# Altium PCB 128x64液晶接线模块.PCBDOC
Units mm, origin at the board's own origin, x right, y up, seen from the top; angles counter-clockwise.
Board outline 152.4 x 101.6 mm, 2 copper layers (Top Layer, Bottom Layer); 4 components, 18 nets, 53 pads, 0 vias.
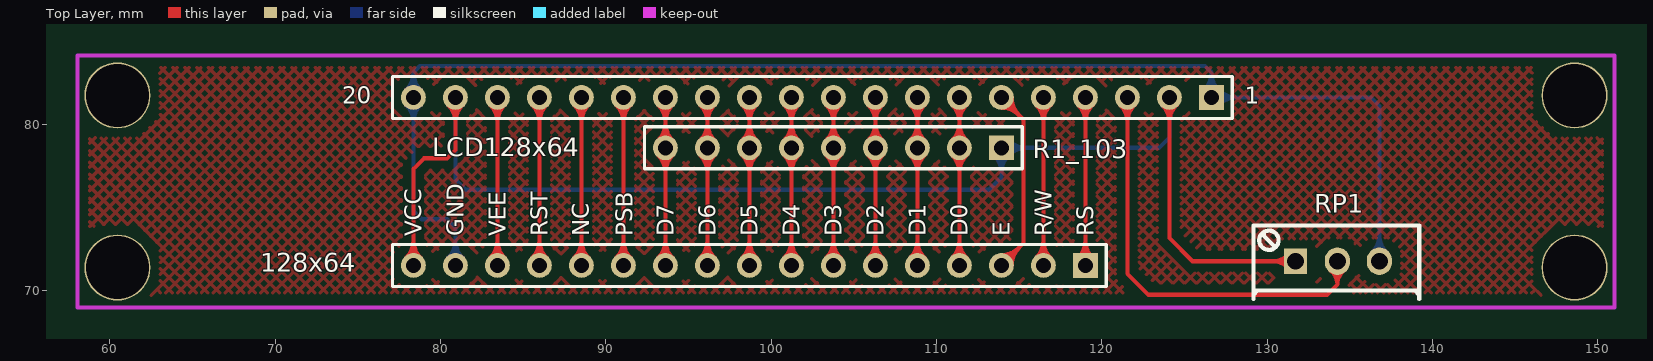
[diagram p0: Top Layer view]
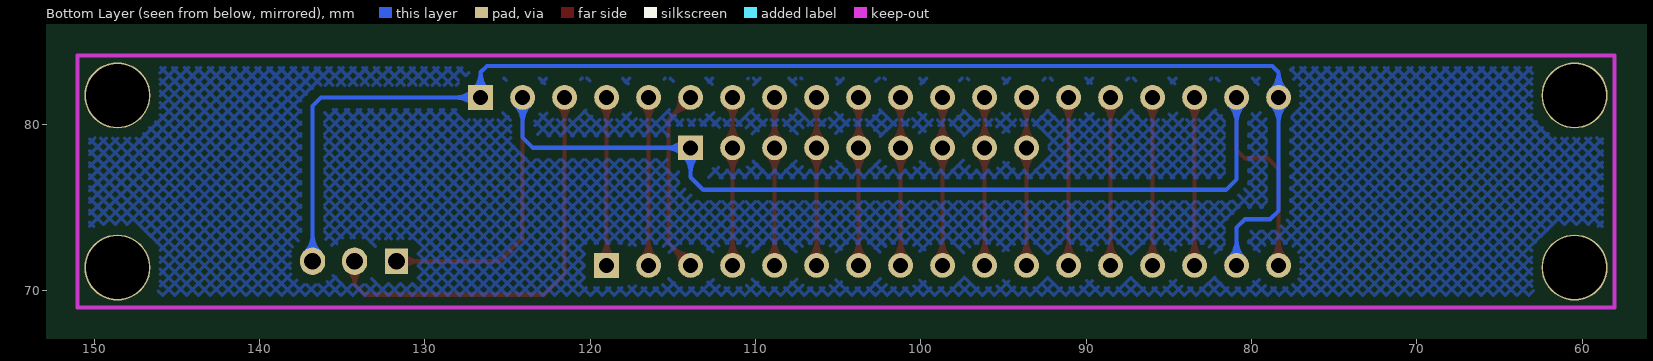
[diagram p1: Bottom Layer view, seen from below]

## Layer stack, top to bottom
Top Layer: signal copper 0.0356
Dielectric: dielectric 0.32, FR-4, Dk 4.8
Bottom Layer: signal copper 0.0356

## Board outline
25.4,25.4 177.8,25.4 177.8,127 25.4,127

## Design rules (kind name [scope] priority, off if disabled: settings)
Clearance [All] p1: gap=0.5
ComponentClearance [All] p1: gap=0.254 collisioncheckmode=3 verticalgap=0.254
PolygonConnect [All] p1: connectstyle=Relief reliefconductorwidth=0.254 reliefentries=4 polygonreliefangle="90 Angle"
RoutingVias [All] p1: holewidth=0.711 width=1.27 viastyle="Through Hole" minholewidth=0.711 minwidth=1.27 maxholewidth=0.711 maxwidth=1.27
SolderMaskExpansion [All] p1: expansion=0.102
TestPointUsage [All] p1: valid=0 allowmultiple=FALSE
Testpoint [All] p1: side=15 testpointundercomponent=TRUE minsize=1.016 maxsize=2.54 preferedsize=1.524 minholesize=0 maxholesize=1.016 preferedholesize=0.813 testpointgrid=0.025 style=1023 order=0-112345678
Width [All] p1: maxlimit=0.254 minlimit=0.254 preferedwidth=0.254
17 further rules are at their usual default settings.

## Components (designator, comment, footprint, x,y, rotation, side; value= is the part's Value field where it differs from the comment)
128x64 "Header 17" HDR1X17 118.999,71.501 r180 top
LCD128x64 "Header 20" HDR1X20 126.619,81.661 r180 top
R1_103 "Header 9" HDR1X9 113.919,78.613 r180 top
RP1 "Res _JT" SIP3-D 131.699,71.501 r0 top

## Footprints (in the part's own frame and the unit in brackets; to place one, negate y for a bottom-side part, rotate by r counter-clockwise, add the part's x,y. Pads: shape width x height; smd on the part's side, far side on the other; paste and mask are expansions set on the pad)
HDR1X9 [mm] "Connector; Header; 9 Position"
  rect 1.5x1.5 hole 0.9: 1(0,0)
  round 1.5 hole 0.9: 2(2.54,0) 3(5.08,0) 4(7.62,0) 5(10.16,0) 6(12.7,0) 7(15.24,0) 8(17.78,0) 9(20.32,0)
  silkscreen extent -1.27,-1.27 21.59,1.27
HDR1X17 [mm] "Connector; Header; 17 Position"
  rect 1.5x1.5 hole 0.9: 1(0,0)
  round 1.5 hole 0.9: 2(2.54,0) 3(5.08,0) 4(7.62,0) 5(10.16,0) 6(12.7,0) 7(15.24,0) 8(17.78,0) 9(20.32,0) 10(22.86,0) 11(25.4,0) 12(27.94,0) 13(30.48,0) 14(33.02,0) 15(35.56,0) 16(38.1,0) 17(40.64,0)
  silkscreen extent -1.27,-1.27 41.91,1.27
HDR1X20 [mm] "Connector; Header; 20 Position"
  rect 1.5x1.5 hole 0.9: 1(0,0)
  round 1.5 hole 0.9: 2(2.54,0) 3(5.08,0) 4(7.62,0) 5(10.16,0) 6(12.7,0) 7(15.24,0) 8(17.78,0) 9(20.32,0) 10(22.86,0) 11(25.4,0) 12(27.94,0) 13(30.48,0) 14(33.02,0) 15(35.56,0) 16(38.1,0) 17(40.64,0) 18(43.18,0) 19(45.72,0) 20(48.26,0)
  silkscreen extent -1.27,-1.27 49.53,1.27
SIP3-D [mil] "精调电位器"
  rect 55x60 hole 40: 1(0,10)
  oval 60x65 hole 40: 2(200,10) 3(100,10)
  silkscreen extent -100,-80 295,95

## Part data
128x64: library part "Header 13", "Header, 13-Pin"
LCD128x64: "Header, 20-Pin"
R1_103: "Header, 9-Pin"
RP1: "j精调电阻"

## Free pads (board coordinates)
  round 4 hole 3.8: 1(60.452,81.788) 2(60.452,71.374) 3(148.59,81.788) 4(148.59,71.374)

## Nets (pads, with @x,y where several pads share a name; then routed paths per layer and width w, separated by ;. In a path a pad name is that pad's centre, name@x,y a point inside that pad or via, vN(x,y) a via of type N, cw(c..) or ccw(c..) an arc to the next point about the centre after c; other vN are vias at no path point)
BLA: 128x64.17 LCD128x64.2 LCD128x64.19 R1_103.1 RP1.1 | length 111.6
  Top Layer w0.254: 128x64.17@77.918,71.942 ccw(c76.855,73.005) 78.359,73.005 ccw(c79.863,73.005) 128x64.17@78.8,71.942 ; 128x64.17@78.098,71.762 ccw(c77.468,72.392) 78.359,72.392 ccw(c79.25,72.392) 128x64.17@78.62,71.762 ; 128x64.17 78.359,77.343 78.994,77.978 80.391,77.978 80.899,78.486 LCD128x64.19 ; LCD128x64.19@80.458,81.22 cw(c79.395,80.157) 80.899,80.157 cw(c82.403,80.157) LCD128x64.19@81.34,81.22 ; LCD128x64.19@80.638,81.4 cw(c80.008,80.77) 80.899,80.77 cw(c81.79,80.77) LCD128x64.19@81.16,81.4 ; LCD128x64.2@123.638,81.22 cw(c122.575,80.157) 124.079,80.157 cw(c125.583,80.157) LCD128x64.2@124.52,81.22 ; LCD128x64.2@123.818,81.4 cw(c123.188,80.77) 124.079,80.77 cw(c124.97,80.77) LCD128x64.2@124.34,81.4 ; LCD128x64.2 124.079,73.152 125.476,71.755 RP1.1 ; RP1.1@131.295,71.351 ccw(c130.319,70.375) 130.319,71.755 ccw(c130.319,73.135) RP1.1@131.295,72.159 ; RP1.1@131.474,71.53 ccw(c130.932,70.988) 130.932,71.755 ccw(c130.932,72.522) RP1.1@131.474,71.98
  Bottom Layer w0.254: LCD128x64.19@80.458,81.22 cw(c79.395,80.157) 80.899,80.157 cw(c82.403,80.157) LCD128x64.19@81.34,81.22 ; LCD128x64.19@80.638,81.4 cw(c80.008,80.77) 80.899,80.77 cw(c81.79,80.77) LCD128x64.19@81.16,81.4 ; LCD128x64.19 80.899,76.708 81.534,76.073 113.157,76.073 113.919,76.835 R1_103.1 123.444,78.613 124.079,79.248 LCD128x64.2 ; R1_103.1@113.478,78.172 cw(c112.415,77.109) 113.919,77.109 cw(c115.423,77.109) 114.36,78.172 cw(c115.423,77.109) 115.423,78.613 cw(c115.423,80.117) R1_103.1@114.36,79.054 ; R1_103.1@113.658,78.352 cw(c113.028,77.722) 113.919,77.722 cw(c114.81,77.722) 114.18,78.352 cw(c114.81,77.722) 114.81,78.613 cw(c114.81,79.504) R1_103.1@114.18,78.874 ; LCD128x64.2@123.638,81.22 cw(c122.575,80.157) 124.079,80.157 cw(c125.583,80.157) LCD128x64.2@124.52,81.22 ; LCD128x64.2@123.818,81.4 cw(c123.188,80.77) 124.079,80.77 cw(c124.97,80.77) LCD128x64.2@124.34,81.4
BLK: 128x64.16 LCD128x64.1 LCD128x64.20 RP1.2 | length 106.2
  Bottom Layer w0.254: LCD128x64.20@77.918,81.22 cw(c76.855,80.157) 78.359,80.157 cw(c79.863,80.157) LCD128x64.20@78.8,81.22 ; LCD128x64.20@77.918,82.102 ccw(c76.855,83.165) 78.359,83.165 ccw(c79.863,83.165) LCD128x64.20@78.8,82.102 ; LCD128x64.20@78.098,81.4 cw(c77.468,80.77) 78.359,80.77 cw(c79.25,80.77) LCD128x64.20@78.62,81.4 ; LCD128x64.20@78.098,81.922 ccw(c77.468,82.552) 78.359,82.552 ccw(c79.25,82.552) LCD128x64.20@78.62,81.922 ; 128x64.16@80.458,71.942 ccw(c79.395,73.005) 80.899,73.005 ccw(c82.403,73.005) 128x64.16@81.34,71.942 ; 128x64.16@80.638,71.762 ccw(c80.008,72.392) 80.899,72.392 ccw(c81.79,72.392) 128x64.16@81.16,71.762 ; 128x64.16 80.899,73.787 80.391,74.295 78.867,74.295 78.359,74.803 78.359,83.185 78.74,83.566 126.238,83.566 126.619,83.185 LCD128x64.1 136.271,81.661 136.779,81.153 RP1.2 ; LCD128x64.1@126.178,82.102 ccw(c125.115,83.165) 126.619,83.165 ccw(c128.123,83.165) 127.06,82.102 ccw(c128.123,83.165) 128.123,81.661 ccw(c128.123,80.157) LCD128x64.1@127.06,81.22 ; LCD128x64.1@126.358,81.922 ccw(c125.728,82.552) 126.619,82.552 ccw(c127.51,82.552) 126.88,81.922 ccw(c127.51,82.552) 127.51,81.661 ccw(c127.51,80.77) LCD128x64.1@126.88,81.4 ; RP1.2@136.33,72.268 ccw(c135.246,73.352) 136.779,73.352 ccw(c138.312,73.352) RP1.2@137.228,72.268 ; RP1.2@136.51,72.088 ccw(c135.859,72.738) 136.779,72.738 ccw(c137.699,72.738) RP1.2@137.048,72.088
D0: 128x64.4 LCD128x64.7 R1_103.2 | length 25.2
  Top Layer w0.254: 128x64.4@110.938,71.942 ccw(c109.875,73.005) 111.379,73.005 ccw(c112.883,73.005) 128x64.4@111.82,71.942 ; R1_103.2@110.938,78.172 cw(c109.875,77.109) 111.379,77.109 cw(c112.883,77.109) R1_103.2@111.82,78.172 ; R1_103.2@110.938,79.054 ccw(c109.875,80.117) 111.379,80.117 ccw(c112.883,80.117) R1_103.2@111.82,79.054 ; LCD128x64.7@110.938,81.22 cw(c109.875,80.157) 111.379,80.157 cw(c112.883,80.157) LCD128x64.7@111.82,81.22 ; 128x64.4@111.118,71.762 ccw(c110.488,72.392) 111.379,72.392 ccw(c112.27,72.392) 128x64.4@111.64,71.762 ; R1_103.2@111.118,78.352 cw(c110.488,77.722) 111.379,77.722 cw(c112.27,77.722) R1_103.2@111.64,78.352 ; R1_103.2@111.118,78.874 ccw(c110.488,79.504) 111.379,79.504 ccw(c112.27,79.504) R1_103.2@111.64,78.874 ; LCD128x64.7@111.118,81.4 cw(c110.488,80.77) 111.379,80.77 cw(c112.27,80.77) LCD128x64.7@111.64,81.4 ; 128x64.4 R1_103.2 LCD128x64.7
D1: 128x64.5 LCD128x64.8 R1_103.3 | length 25.2
  Top Layer w0.254: 128x64.5@108.398,71.942 ccw(c107.335,73.005) 108.839,73.005 ccw(c110.343,73.005) 128x64.5@109.28,71.942 ; R1_103.3@108.398,78.172 cw(c107.335,77.109) 108.839,77.109 cw(c110.343,77.109) R1_103.3@109.28,78.172 ; R1_103.3@108.398,79.054 ccw(c107.335,80.117) 108.839,80.117 ccw(c110.343,80.117) R1_103.3@109.28,79.054 ; LCD128x64.8@108.398,81.22 cw(c107.335,80.157) 108.839,80.157 cw(c110.343,80.157) LCD128x64.8@109.28,81.22 ; 128x64.5@108.578,71.762 ccw(c107.948,72.392) 108.839,72.392 ccw(c109.73,72.392) 128x64.5@109.1,71.762 ; R1_103.3@108.578,78.352 cw(c107.948,77.722) 108.839,77.722 cw(c109.73,77.722) R1_103.3@109.1,78.352 ; R1_103.3@108.578,78.874 ccw(c107.948,79.504) 108.839,79.504 ccw(c109.73,79.504) R1_103.3@109.1,78.874 ; LCD128x64.8@108.578,81.4 cw(c107.948,80.77) 108.839,80.77 cw(c109.73,80.77) LCD128x64.8@109.1,81.4 ; 128x64.5 R1_103.3 LCD128x64.8
D2: 128x64.6 LCD128x64.9 R1_103.4 | length 25.2
  Top Layer w0.254: 128x64.6@105.858,71.942 ccw(c104.795,73.005) 106.299,73.005 ccw(c107.803,73.005) 128x64.6@106.74,71.942 ; R1_103.4@105.858,78.172 cw(c104.795,77.109) 106.299,77.109 cw(c107.803,77.109) R1_103.4@106.74,78.172 ; R1_103.4@105.858,79.054 ccw(c104.795,80.117) 106.299,80.117 ccw(c107.803,80.117) R1_103.4@106.74,79.054 ; LCD128x64.9@105.858,81.22 cw(c104.795,80.157) 106.299,80.157 cw(c107.803,80.157) LCD128x64.9@106.74,81.22 ; 128x64.6@106.038,71.762 ccw(c105.408,72.392) 106.299,72.392 ccw(c107.19,72.392) 128x64.6@106.56,71.762 ; R1_103.4@106.038,78.352 cw(c105.408,77.722) 106.299,77.722 cw(c107.19,77.722) R1_103.4@106.56,78.352 ; R1_103.4@106.038,78.874 ccw(c105.408,79.504) 106.299,79.504 ccw(c107.19,79.504) R1_103.4@106.56,78.874 ; LCD128x64.9@106.038,81.4 cw(c105.408,80.77) 106.299,80.77 cw(c107.19,80.77) LCD128x64.9@106.56,81.4 ; 128x64.6 R1_103.4 LCD128x64.9
D3: 128x64.7 LCD128x64.10 R1_103.5 | length 25.2
  Top Layer w0.254: 128x64.7@103.318,71.942 ccw(c102.255,73.005) 103.759,73.005 ccw(c105.263,73.005) 128x64.7@104.2,71.942 ; R1_103.5@103.318,78.172 cw(c102.255,77.109) 103.759,77.109 cw(c105.263,77.109) R1_103.5@104.2,78.172 ; R1_103.5@103.318,79.054 ccw(c102.255,80.117) 103.759,80.117 ccw(c105.263,80.117) R1_103.5@104.2,79.054 ; LCD128x64.10@103.318,81.22 cw(c102.255,80.157) 103.759,80.157 cw(c105.263,80.157) LCD128x64.10@104.2,81.22 ; 128x64.7@103.498,71.762 ccw(c102.868,72.392) 103.759,72.392 ccw(c104.65,72.392) 128x64.7@104.02,71.762 ; R1_103.5@103.498,78.352 cw(c102.868,77.722) 103.759,77.722 cw(c104.65,77.722) R1_103.5@104.02,78.352 ; R1_103.5@103.498,78.874 ccw(c102.868,79.504) 103.759,79.504 ccw(c104.65,79.504) R1_103.5@104.02,78.874 ; LCD128x64.10@103.498,81.4 cw(c102.868,80.77) 103.759,80.77 cw(c104.65,80.77) LCD128x64.10@104.02,81.4 ; 128x64.7 R1_103.5 LCD128x64.10
D4: 128x64.8 LCD128x64.11 R1_103.6 | length 25.2
  Top Layer w0.254: 128x64.8@100.778,71.942 ccw(c99.715,73.005) 101.219,73.005 ccw(c102.723,73.005) 128x64.8@101.66,71.942 ; R1_103.6@100.778,78.172 cw(c99.715,77.109) 101.219,77.109 cw(c102.723,77.109) R1_103.6@101.66,78.172 ; R1_103.6@100.778,79.054 ccw(c99.715,80.117) 101.219,80.117 ccw(c102.723,80.117) R1_103.6@101.66,79.054 ; LCD128x64.11@100.778,81.22 cw(c99.715,80.157) 101.219,80.157 cw(c102.723,80.157) LCD128x64.11@101.66,81.22 ; 128x64.8@100.958,71.762 ccw(c100.328,72.392) 101.219,72.392 ccw(c102.11,72.392) 128x64.8@101.48,71.762 ; R1_103.6@100.958,78.352 cw(c100.328,77.722) 101.219,77.722 cw(c102.11,77.722) R1_103.6@101.48,78.352 ; R1_103.6@100.958,78.874 ccw(c100.328,79.504) 101.219,79.504 ccw(c102.11,79.504) R1_103.6@101.48,78.874 ; LCD128x64.11@100.958,81.4 cw(c100.328,80.77) 101.219,80.77 cw(c102.11,80.77) LCD128x64.11@101.48,81.4 ; 128x64.8 R1_103.6 LCD128x64.11
D5: 128x64.9 LCD128x64.12 R1_103.7 | length 25.2
  Top Layer w0.254: 128x64.9@98.238,71.942 ccw(c97.175,73.005) 98.679,73.005 ccw(c100.183,73.005) 128x64.9@99.12,71.942 ; R1_103.7@98.238,78.172 cw(c97.175,77.109) 98.679,77.109 cw(c100.183,77.109) R1_103.7@99.12,78.172 ; R1_103.7@98.238,79.054 ccw(c97.175,80.117) 98.679,80.117 ccw(c100.183,80.117) R1_103.7@99.12,79.054 ; LCD128x64.12@98.238,81.22 cw(c97.175,80.157) 98.679,80.157 cw(c100.183,80.157) LCD128x64.12@99.12,81.22 ; 128x64.9@98.418,71.762 ccw(c97.788,72.392) 98.679,72.392 ccw(c99.57,72.392) 128x64.9@98.94,71.762 ; R1_103.7@98.418,78.352 cw(c97.788,77.722) 98.679,77.722 cw(c99.57,77.722) R1_103.7@98.94,78.352 ; R1_103.7@98.418,78.874 ccw(c97.788,79.504) 98.679,79.504 ccw(c99.57,79.504) R1_103.7@98.94,78.874 ; LCD128x64.12@98.418,81.4 cw(c97.788,80.77) 98.679,80.77 cw(c99.57,80.77) LCD128x64.12@98.94,81.4 ; 128x64.9 R1_103.7 LCD128x64.12
D6: 128x64.10 LCD128x64.13 R1_103.8 | length 25.2
  Top Layer w0.254: 128x64.10@95.698,71.942 ccw(c94.635,73.005) 96.139,73.005 ccw(c97.643,73.005) 128x64.10@96.58,71.942 ; R1_103.8@95.698,78.172 cw(c94.635,77.109) 96.139,77.109 cw(c97.643,77.109) R1_103.8@96.58,78.172 ; R1_103.8@95.698,79.054 ccw(c94.635,80.117) 96.139,80.117 ccw(c97.643,80.117) R1_103.8@96.58,79.054 ; LCD128x64.13@95.698,81.22 cw(c94.635,80.157) 96.139,80.157 cw(c97.643,80.157) LCD128x64.13@96.58,81.22 ; 128x64.10@95.878,71.762 ccw(c95.248,72.392) 96.139,72.392 ccw(c97.03,72.392) 128x64.10@96.4,71.762 ; R1_103.8@95.878,78.352 cw(c95.248,77.722) 96.139,77.722 cw(c97.03,77.722) R1_103.8@96.4,78.352 ; R1_103.8@95.878,78.874 ccw(c95.248,79.504) 96.139,79.504 ccw(c97.03,79.504) R1_103.8@96.4,78.874 ; LCD128x64.13@95.878,81.4 cw(c95.248,80.77) 96.139,80.77 cw(c97.03,80.77) LCD128x64.13@96.4,81.4 ; 128x64.10 R1_103.8 LCD128x64.13
D7: 128x64.11 LCD128x64.14 R1_103.9 | length 25.2
  Top Layer w0.254: 128x64.11@93.158,71.942 ccw(c92.095,73.005) 93.599,73.005 ccw(c95.103,73.005) 128x64.11@94.04,71.942 ; R1_103.9@93.158,78.172 cw(c92.095,77.109) 93.599,77.109 cw(c95.103,77.109) R1_103.9@94.04,78.172 ; R1_103.9@93.158,79.054 ccw(c92.095,80.117) 93.599,80.117 ccw(c95.103,80.117) R1_103.9@94.04,79.054 ; LCD128x64.14@93.158,81.22 cw(c92.095,80.157) 93.599,80.157 cw(c95.103,80.157) LCD128x64.14@94.04,81.22 ; 128x64.11@93.338,71.762 ccw(c92.708,72.392) 93.599,72.392 ccw(c94.49,72.392) 128x64.11@93.86,71.762 ; R1_103.9@93.338,78.352 cw(c92.708,77.722) 93.599,77.722 cw(c94.49,77.722) R1_103.9@93.86,78.352 ; R1_103.9@93.338,78.874 ccw(c92.708,79.504) 93.599,79.504 ccw(c94.49,79.504) R1_103.9@93.86,78.874 ; LCD128x64.14@93.338,81.4 cw(c92.708,80.77) 93.599,80.77 cw(c94.49,80.77) LCD128x64.14@93.86,81.4 ; 128x64.11 R1_103.9 LCD128x64.14
E: 128x64.3 LCD128x64.6 | length 18.8
  Top Layer w0.254: 128x64.3 115.265,72.847 115.265,80.315 LCD128x64.6 ; 128x64.3@113.919,71.87 ccw(c113.919,72.761) 114.549,72.131 ccw(c115.179,71.501) 128x64.3@114.288,71.501 ; 128x64.3@113.919,72.124 ccw(c113.919,73.628) 114.983,72.565 ccw(c116.046,71.501) 128x64.3@114.542,71.501 ; LCD128x64.6@113.919,81.038 cw(c113.919,79.534) 114.983,80.597 cw(c116.046,81.661) LCD128x64.6@114.542,81.661 ; LCD128x64.6@113.919,81.292 cw(c113.919,80.401) 114.549,81.031 cw(c115.179,81.661) LCD128x64.6@114.288,81.661
NC: 128x64.13 LCD128x64.16 | length 17.7
  Top Layer w0.254: 128x64.13@88.078,71.942 ccw(c87.015,73.005) 88.519,73.005 ccw(c90.023,73.005) 128x64.13@88.96,71.942 ; LCD128x64.16@88.078,81.22 cw(c87.015,80.157) 88.519,80.157 cw(c90.023,80.157) LCD128x64.16@88.96,81.22 ; 128x64.13@88.258,71.762 ccw(c87.628,72.392) 88.519,72.392 ccw(c89.41,72.392) 128x64.13@88.78,71.762 ; LCD128x64.16@88.258,81.4 cw(c87.628,80.77) 88.519,80.77 cw(c89.41,80.77) LCD128x64.16@88.78,81.4 ; 128x64.13 LCD128x64.16
PSB: 128x64.12 LCD128x64.15 | length 17.7
  Top Layer w0.254: 128x64.12@90.618,71.942 ccw(c89.555,73.005) 91.059,73.005 ccw(c92.563,73.005) 128x64.12@91.5,71.942 ; LCD128x64.15@90.618,81.22 cw(c89.555,80.157) 91.059,80.157 cw(c92.563,80.157) LCD128x64.15@91.5,81.22 ; 128x64.12@90.798,71.762 ccw(c90.168,72.392) 91.059,72.392 ccw(c91.95,72.392) 128x64.12@91.32,71.762 ; LCD128x64.15@90.798,81.4 cw(c90.168,80.77) 91.059,80.77 cw(c91.95,80.77) LCD128x64.15@91.32,81.4 ; 128x64.12 LCD128x64.15
R/W: 128x64.2 LCD128x64.5 | length 17.7
  Top Layer w0.254: 128x64.2@116.018,71.942 ccw(c114.955,73.005) 116.459,73.005 ccw(c117.963,73.005) 128x64.2@116.9,71.942 ; LCD128x64.5@116.018,81.22 cw(c114.955,80.157) 116.459,80.157 cw(c117.963,80.157) LCD128x64.5@116.9,81.22 ; 128x64.2@116.198,71.762 ccw(c115.568,72.392) 116.459,72.392 ccw(c117.35,72.392) 128x64.2@116.72,71.762 ; LCD128x64.5@116.198,81.4 cw(c115.568,80.77) 116.459,80.77 cw(c117.35,80.77) LCD128x64.5@116.72,81.4 ; 128x64.2 LCD128x64.5
RS: 128x64.1 LCD128x64.4 | length 17.7
  Top Layer w0.254: 128x64.1@118.558,71.942 ccw(c117.495,73.005) 118.999,73.005 ccw(c120.503,73.005) 128x64.1@119.44,71.942 ; LCD128x64.4@118.558,81.22 cw(c117.495,80.157) 118.999,80.157 cw(c120.503,80.157) LCD128x64.4@119.44,81.22 ; 128x64.1@118.738,71.762 ccw(c118.108,72.392) 118.999,72.392 ccw(c119.89,72.392) 128x64.1@119.26,71.762 ; LCD128x64.4@118.738,81.4 cw(c118.108,80.77) 118.999,80.77 cw(c119.89,80.77) LCD128x64.4@119.26,81.4 ; 128x64.1 LCD128x64.4
RST: 128x64.14 LCD128x64.17 | length 17.7
  Top Layer w0.254: 128x64.14@85.538,71.942 ccw(c84.475,73.005) 85.979,73.005 ccw(c87.483,73.005) 128x64.14@86.42,71.942 ; LCD128x64.17@85.538,81.22 cw(c84.475,80.157) 85.979,80.157 cw(c87.483,80.157) LCD128x64.17@86.42,81.22 ; 128x64.14@85.718,71.762 ccw(c85.088,72.392) 85.979,72.392 ccw(c86.87,72.392) 128x64.14@86.24,71.762 ; LCD128x64.17@85.718,81.4 cw(c85.088,80.77) 85.979,80.77 cw(c86.87,80.77) LCD128x64.17@86.24,81.4 ; 128x64.14 LCD128x64.17
VEE: 128x64.15 LCD128x64.18 | length 17.7
  Top Layer w0.254: 128x64.15@82.998,71.942 ccw(c81.935,73.005) 83.439,73.005 ccw(c84.943,73.005) 128x64.15@83.88,71.942 ; LCD128x64.18@82.998,81.22 cw(c81.935,80.157) 83.439,80.157 cw(c84.943,80.157) LCD128x64.18@83.88,81.22 ; 128x64.15@83.178,71.762 ccw(c82.548,72.392) 83.439,72.392 ccw(c84.33,72.392) 128x64.15@83.7,71.762 ; LCD128x64.18@83.178,81.4 cw(c82.548,80.77) 83.439,80.77 cw(c84.33,80.77) LCD128x64.18@83.7,81.4 ; 128x64.15 LCD128x64.18
VL: LCD128x64.3 RP1.3 | length 32.4
  Top Layer w0.254: LCD128x64.3@121.098,81.22 cw(c120.035,80.157) 121.539,80.157 cw(c123.043,80.157) LCD128x64.3@121.98,81.22 ; LCD128x64.3@121.278,81.4 cw(c120.648,80.77) 121.539,80.77 cw(c122.43,80.77) LCD128x64.3@121.8,81.4 ; LCD128x64.3 121.539,70.993 122.809,69.723 133.604,69.723 134.239,70.358 ; RP1.3@133.839,71.199 cw(c133.156,70.358) 134.239,70.358 ; RP1.3@133.999,71.396 cw(c133.589,70.891) 134.239,70.891 cw(c134.889,70.891) RP1.3@134.479,71.396 ; RP1.3 134.239,70.358 ; RP1.3@134.639,71.199 ccw(c135.322,70.358) 134.239,70.358

## Polygon pours and split planes (outlines as drawn)
no net on Top Layer (hatched 45Degree grid 0.508 track 0.203): 58.547,83.693 58.547,69.85 150.749,69.85 150.749,83.693
no net on Bottom Layer (hatched 45Degree grid 0.508 track 0.203): 58.039,83.693 58.039,69.215 150.876,69.215 150.876,83.693

## Keep-outs
Keep-Out Layer:
  lines w0.254: 58.039,68.961 58.039,84.201 ; 58.039,68.961 151.003,68.961 151.003,84.201 58.039,84.201 ; 58.039,68.961 58.039,84.201

## Silkscreen, mask and mechanical layers (free items; w line width, h text height)
Top Overlay:
  text "20" at 74.041,81.28 h1.02
  text "1" at 128.651,81.28 h1.02
  text "VCC" at 78.867,73.279 h1.02 r90
  text "GND" at 81.407,73.279 h1.02 r90
  text "VEE" at 83.947,73.279 h1.02 r90
  text "RST" at 86.487,73.279 h1.02 r90
  text "NC" at 88.981,73.279 h1.02 r90
  text "PSB" at 91.614,73.279 h1.02 r90
  text "D7" at 94.107,73.279 h1.02 r90
  text "D6" at 96.647,73.279 h1.02 r90
  text "D5" at 99.187,73.279 h1.02 r90
  text "D4" at 101.727,73.279 h1.02 r90
  text "D3" at 104.267,73.279 h1.02 r90
  text "D2" at 106.807,73.279 h1.02 r90
  text "D1" at 109.347,73.279 h1.02 r90
  text "D0" at 111.887,73.279 h1.02 r90
  text "E" at 114.427,73.279 h1.02 r90
  text "R/W" at 116.967,73.279 h1.02 r90
  text "RS" at 119.507,73.279 h1.02 r90
Mechanical 1:
  lines w0.254: 55.74,85.469 56.261,83.949 ; 55.893,67.435 56.388,68.963 ; 56.007,83.947 56.515,83.951 ; 56.134,68.961 56.642,68.965 ; 56.239,86.489 56.261,83.949 ; 56.41,66.423 56.388,68.963 ; 56.756,85.477 56.261,83.949 ; 56.909,67.443 56.388,68.963 ; 57.914,86.732 57.914,87.24 ; 59.438,86.478 57.914,86.986 ; 59.438,87.494 57.914,86.986 ; 95.631,86.995 57.914,86.986 ; 113.202,86.999 150.919,87.009 ; 149.395,86.501 150.919,87.009 ; 149.395,87.517 150.919,87.009 ; 150.919,86.755 150.919,87.263 ; 58.039,68.961 151.003,68.961 151.003,84.201 58.039,84.201 58.039,68.961
  text "93.0048 (mm)" at 95.885,86.081 h1.52 r0.01
  text "14.9865 (mm)" at 52.597,84.83 h1.52 r270.49